# Altium PCB QVAR6_VC_Backpack.PcbDoc (part 2 of 2)
Units mm, origin at the board's own origin, x right, y up, seen from the top; angles counter-clockwise.
Board outline 19.5 x 16.5 mm, 6 copper layers (Top Layer, Layer 1 (GND), Layer 2 (signal), Layer 3 (power), Layer 4 (GND), Bottom Layer), stack 1.138 mm thick; 113 components, 78 nets, 380 pads, 126 vias.
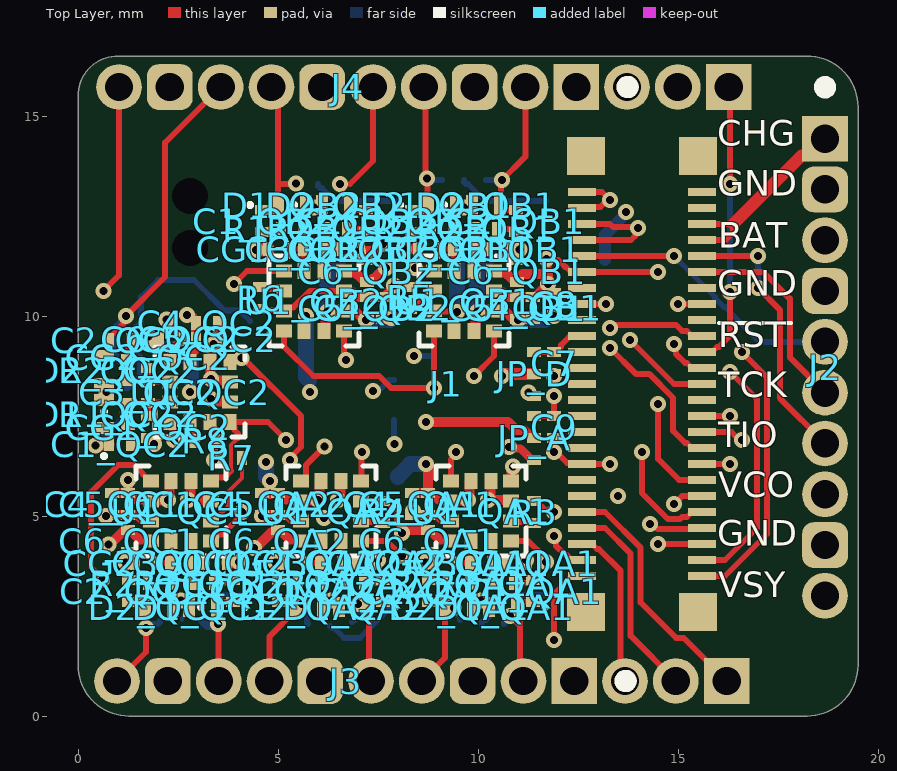
[diagram p0: Top Layer view]

## Via types
v1: diameter 0.4, hole 0.2, Top Layer to Bottom Layer, tented both sides, 126 vias

## Nets (pads, with @x,y where several pads share a name; then routed paths per layer and width w, separated by ;. In a path a pad name is that pad's centre, name@x,y a point inside that pad or via, vN(x,y) a via of type N, cw(c..) or ccw(c..) an arc to the next point about the centre after c; other vN are vias at no path point) (continued)
VBAT: (continued)
  Top Layer w0.15: J1.2 12.625,12.725 13.057,12.725 13.232,12.9 v1(13.3,12.9) 13.1,13.1 J1.1
  Layer 3 (power) w0.3: v1(13.3,12.9) 13.327,12.9 13.427,13 15.384,13 16.484,11.9 18.67,11.9 J2.3
VCORE: C4_QB1.1 C4_QB2.1 C5_QB1.2 C5_QB2.2 C6_QB1.2 C6_QB2.2 C8.1 J1.6 J2.8 JP_A.3 JP_D.3 R5.1 R6.1 U1_QB1.9 U1_QB1.10 U1_QB2.3 U1_QB2.9 U1_QB2.10 | length 30.7
  Top Layer w0.15: R6.1@4.588,10.15 5.126,10.15 U1_QB2.3 5.24,10.215 5.384,10.215 5.795,10.625 U1_QB2.9 ; v1@11.739,11.404 11.998,11.404 12.178,11.225 12.2,11.225 12.3,11.125 12.575,11.125 J1.6 v1(14.5,11.1)
  Top Layer w0.2: v1(10.774,6.728) 10.813,6.689 11.061,6.689 11.325,6.425 11.375,6.425 JP_A.3
  Top Layer w0.25: U1_QB2.9 6.689,10.585 6.874,10.585 6.984,10.475 C5_QB2.2 C4_QB2.1@7.724,10.475 ; U1_QB2.10 6.689,11.085 6.921,11.085 6.971,11.035 6.99,11.035 7.175,10.85 C6_QB2.2 7.275,10.85 7.351,10.926 7.385,10.926 7.659,11.2 v1(7.7,11.2) ; C4_QB2.1@7.725,10.476 7.725,10.544 7.9,10.719 v1(7.9,10.759) 7.929,10.731 8.125,10.731 8.131,10.725 R5.1 ; U1_QB1.9 10.439,10.585 10.624,10.585 10.734,10.475 C5_QB1.2 C4_QB1.1@11.324,10.475 ; U1_QB1.10 10.439,11.085 10.671,11.085 10.721,11.035 10.74,11.035 10.925,10.85 10.99,10.85 10.99,10.925 11.115,11.05 11.718,11.05 v1(11.718,11.425) ; C4_QB1.1@11.325,10.476 C4_QB1.1 11.425,10.476 C4_QB1.1@11.548,10.599 ; 11.75,11.05 v1(11.75,10.8) C4_QB1.1@11.548,10.599 ; C8.1 11.548,10.575 C4_QB1.1@11.548,10.599
  Layer 3 (power) w0.3: v1(10.774,6.728) 11.265,7.218 v1(11.265,8.086) ; v1(14.5,11.1) 15.16,11.1 17.337,8.923 17.337,6.883 J2.8
  Layer 3 (power) w0.4: v1(7.7,11.2) 7.9,11 v1(7.9,10.759) 7.959,10.7 8.55,10.7 ; v1(11.265,8.086) 11.265,9.529 11.45,9.714 11.45,10.186 11.75,10.486 v1(11.75,10.8)
  Layer 3 (power) w0.5: 8.55,10.7 8.993,10.7 9.393,11.1 11.432,11.1 11.718,11.386 v1(11.718,11.425) ; v1@11.725,11.393 11.7,11.368 11.7,10.85 v1(11.75,10.8)
VD2: C7.1 J1.10 JP_D.1 | length 1.4
  Top Layer w0.15: JP_D.1 11.95,9.1 12.075,9.225 12.075,9.272 12.278,9.475 12.575,9.475 J1.10
VSYS: J1.3 J1.4 J2.10 | length 14.2
  Top Layer w0.15: J1.4 13.824,11.9 13.952,12.028 13.952,12.152 v1(14,12.2) ; J1.3 13.294,12.3 13.369,12.225 13.787,12.225
  Layer 3 (power) w0.3: v1(14,12.2) 14,10.031 14.2,9.831 14.2,9.434 14.9,8.734 14.9,6.425 18.159,3.166 18.514,3.166 J2.10
pads on no net: J1.7 J1.9 J1.11 J1.12 J1.13 J1.14 J1.15 J1.16 J1.17 J1.19 J1.20 J1.37 J1.42 J1.44 J1.49 J1.50 J1.E

## Polygon pours and split planes (outlines as drawn)
GND on Layer 1 (GND) "GND_L02_P000" (solid, pour order 0): 0,0 0,16.5 19.5,16.5 19.5,0

## Silkscreen, mask and mechanical layers (free items; w line width, h text height)
Top Overlay:
  lines w0.1: 16.023,9.831 17.83,9.831
  text "CHG" at 15.982,14.04 h1.1
  text "GND" at 15.982,12.79 h1.1
  text "BAT" at 16,11.5 h1.1
  text "GND" at 15.982,10.29 h1.1
  text "RST" at 16,9.013 h1.1
  text "TCK" at 16,7.762 h1.1
  text "TIO" at 16,6.513 h1.1
  text "VCO" at 16,5.263 h1.1
  text "GND" at 15.982,4.04 h1.1
  text "VSY" at 16,2.763 h1.1
Board Layer Stack Bottom Overlay:
  lines w0.1: 16.095,9.896 17.902,9.896
  text "2QC21" at 3.7,14.472 h1.1
  text "2QB21" at 7.7,14.472 h1.1
  text "2QB11" at 11.551,14.413 h1.1
  text "EXTCHG" at 18,14.013 h1.1
  text "GND" at 17.943,12.855 h1.1
  text "VBAT" at 17.925,11.565 h1.1
  text "GND" at 17.943,10.355 h1.1
  text "RST" at 17.925,9.078 h1.1
  text "SWDCLK" at 17.925,7.828 h1.1
  text "SWDIO" at 17.925,6.578 h1.1
  text "VCORE" at 17.925,5.328 h1.1
  text "GND" at 17.943,4.105 h1.1
  text "VSYS" at 17.925,2.828 h1.1
  text "3" at 13.96,1.763 h1.1
  text "2" at 15.25,1.75 h1.1
  text "1" at 16.5,1.75 h1.1
  text "1QC12" at 3.8,1.547 h1.1
  text "1QA22" at 7.6,1.547 h1.1
  text "1QA12" at 11.4,1.547 h1.1
Board Layer Stack Top Solder:
  rectangle: 3.42,6.593 3.587,6.792
  rectangle: 0.65,6.9 0.9,7.075
  rectangle: 11.1,2.725 11.25,2.975
  rectangle: 7.378,9.805 7.6,10.05
  rectangle: 7.25,10.35 7.575,10.6
  rectangle: 11.135,9.799 11.275,10.05
  rectangle: 11.025,10.35 11.3,10.6
  rectangle: 9.95,11.5 10.2,11.85
  rectangle: 10.6,12.525 10.825,12.775
  rectangle: 9.125,11.5 9.35,11.85
  rectangle: 8.375,12.525 8.75,12.775
  rectangle: 6.775,12.525 7.125,12.775
  rectangle: 6.175,11.5 6.475,11.85
  rectangle: 5.325,11.5 5.55,11.85
  rectangle: 4.675,12.525 4.925,12.775
  rectangle: 3.375,9.55 3.625,9.75
  rectangle: 2.825,9.5 3.075,9.8
  rectangle: 0.65,9.1 0.9,9.375
  rectangle: 1.575,8.35 1.925,8.675
  rectangle: 1.575,7.475 1.925,7.825
  rectangle: 4.621,4.898 4.975,5.15
  rectangle: 4.65,5.45 4.95,5.7
  rectangle: 0.925,5.45 1.175,5.7
  rectangle: 0.925,4.9 1.225,5.15
  rectangle: 1.325,2.725 1.6,2.975
  rectangle: 2.025,3.65 2.25,4
  rectangle: 2.875,3.65 3.15,4
  rectangle: 3.45,2.725 3.8,2.975
  rectangle: 5.075,2.725 5.35,2.975
  rectangle: 7.25,2.725 7.575,2.975
  rectangle: 6.625,3.65 6.875,4
  rectangle: 5.775,3.65 6,4
  rectangle: 8.475,4.9 8.65,5.15
  rectangle: 8.475,5.45 8.625,5.7
  rectangle: 8.8,2.725 9.15,2.975
  rectangle: 9.5,3.65 9.775,4
  rectangle: 10.35,3.65 10.7,4
Board:
  the board outline again, w0.1